# EAGLE board HEX3_main_v2.1 (EAGLE 9.7.0)
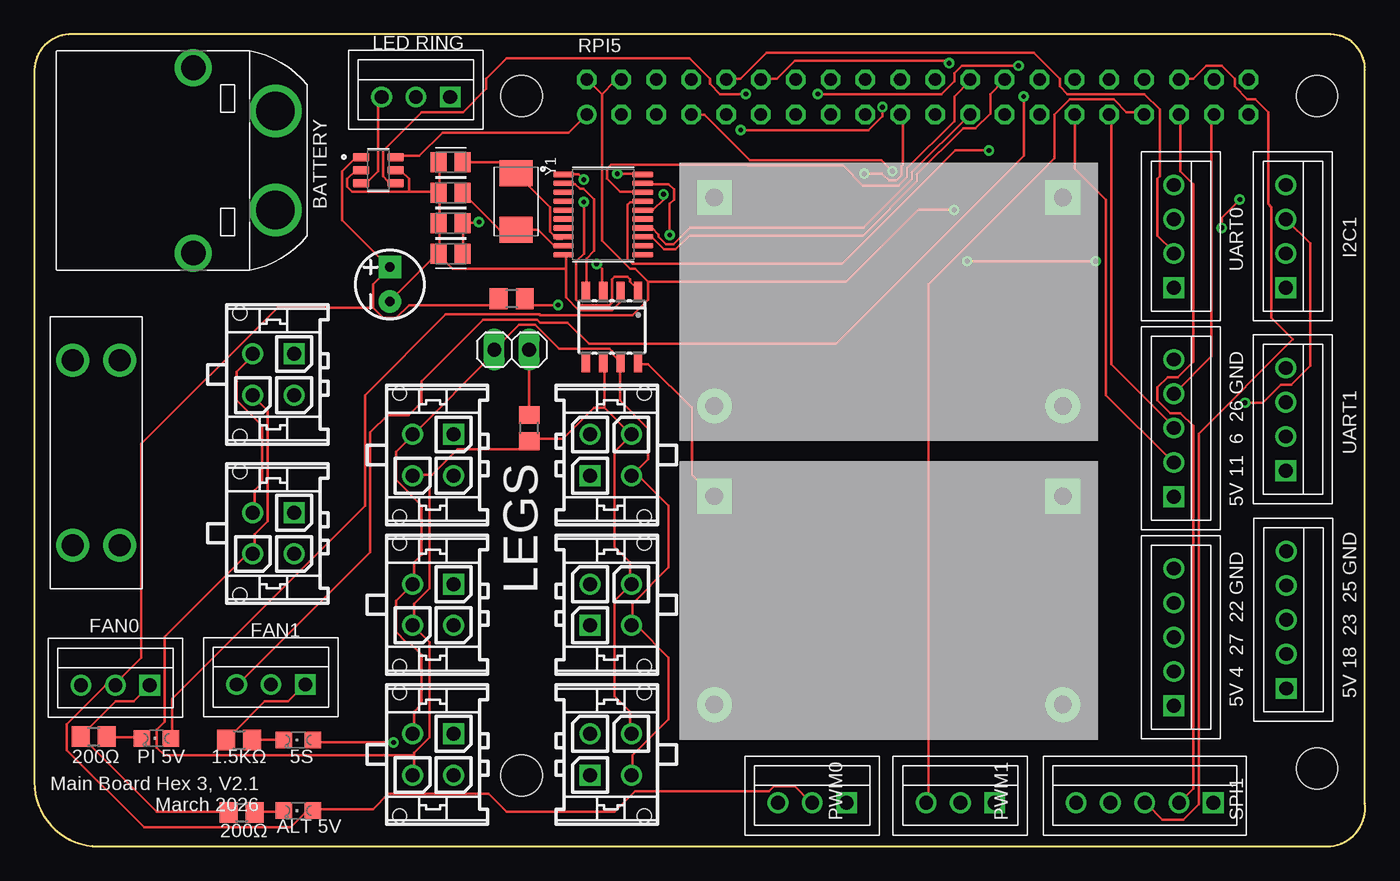
[diagram p0: board, top side]
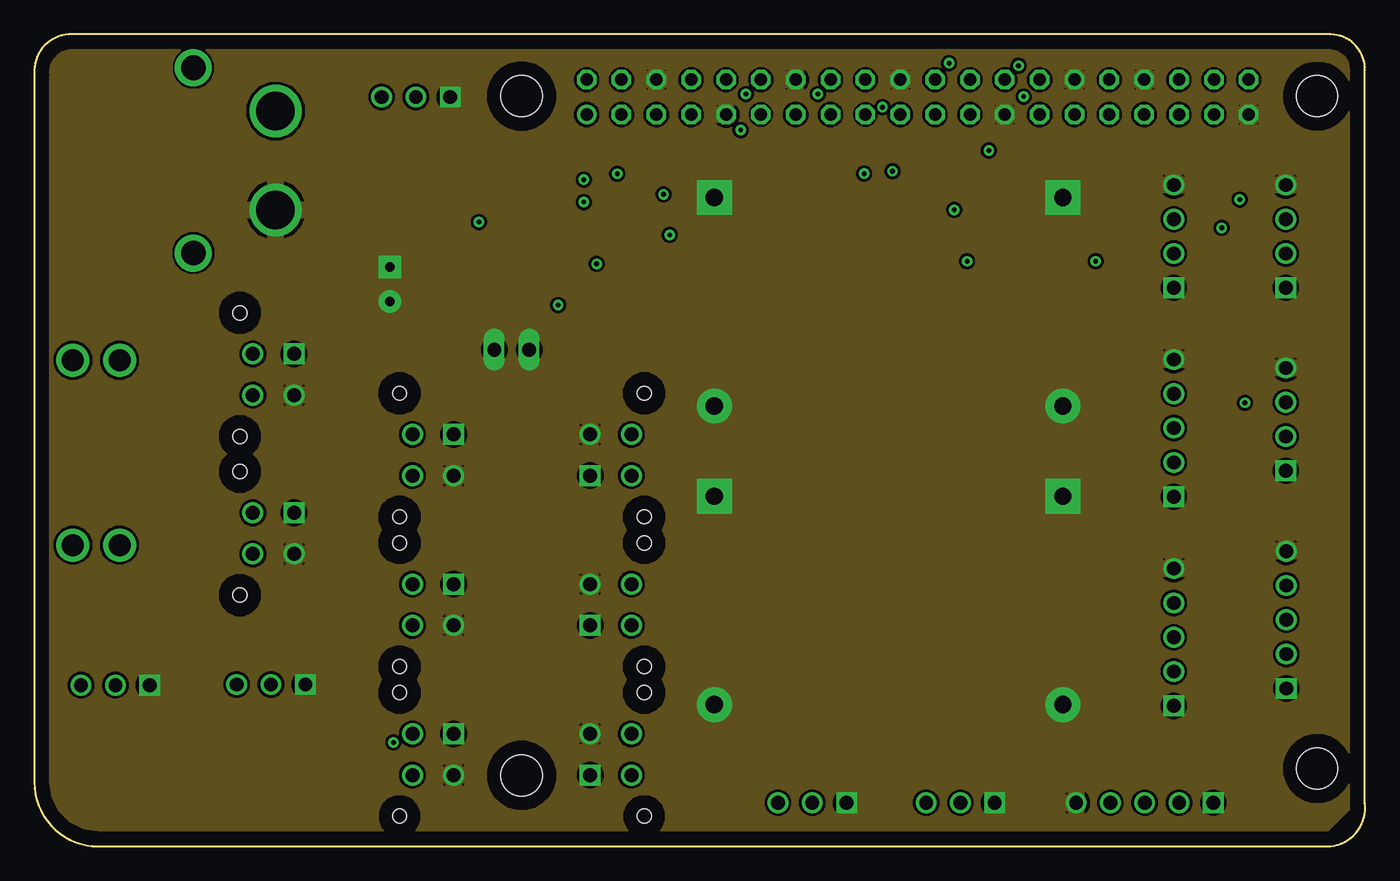
[diagram p1: board, inner layer Route2]
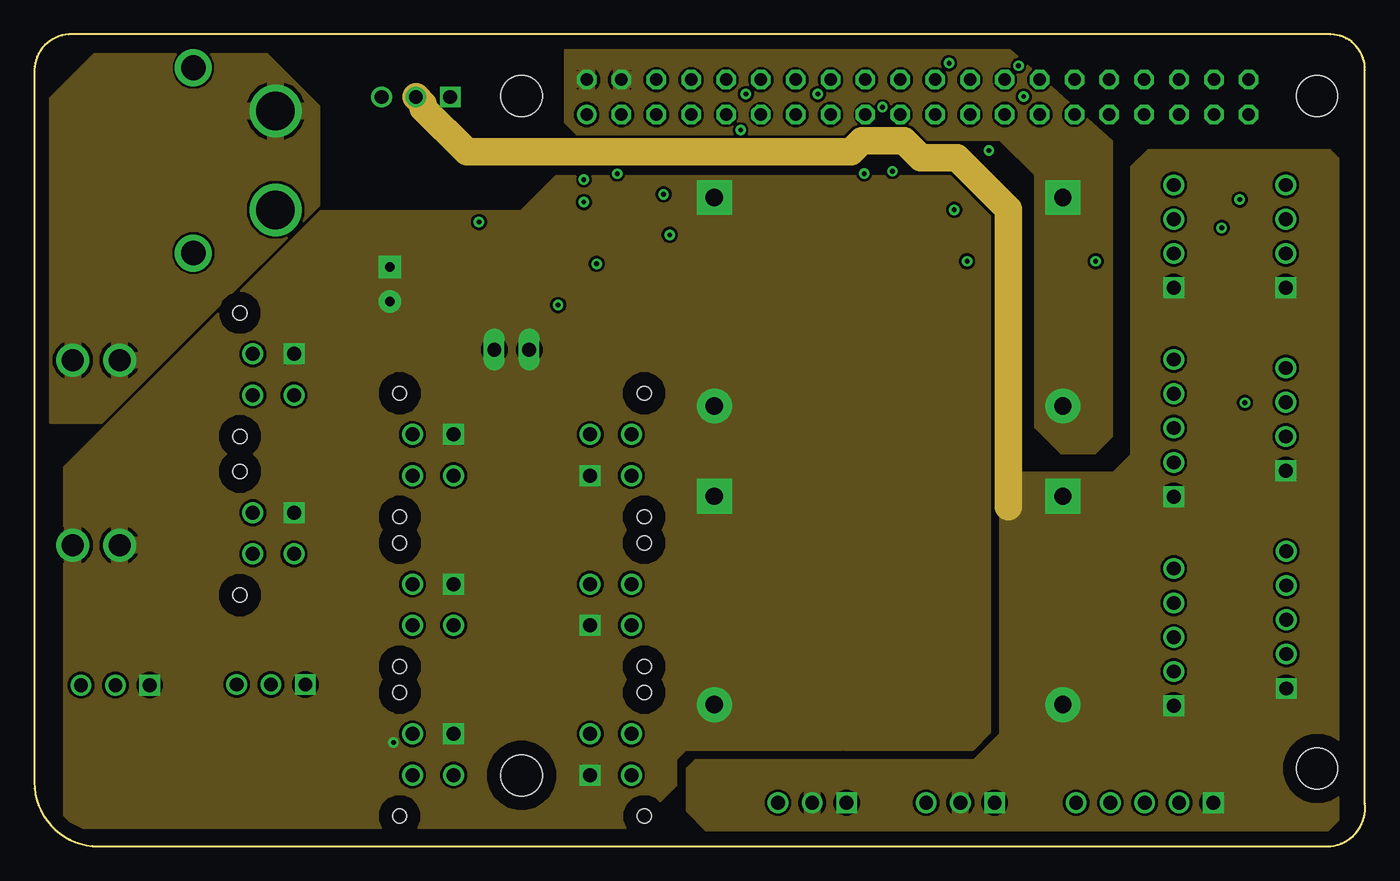
[diagram p2: board, inner layer Route63]
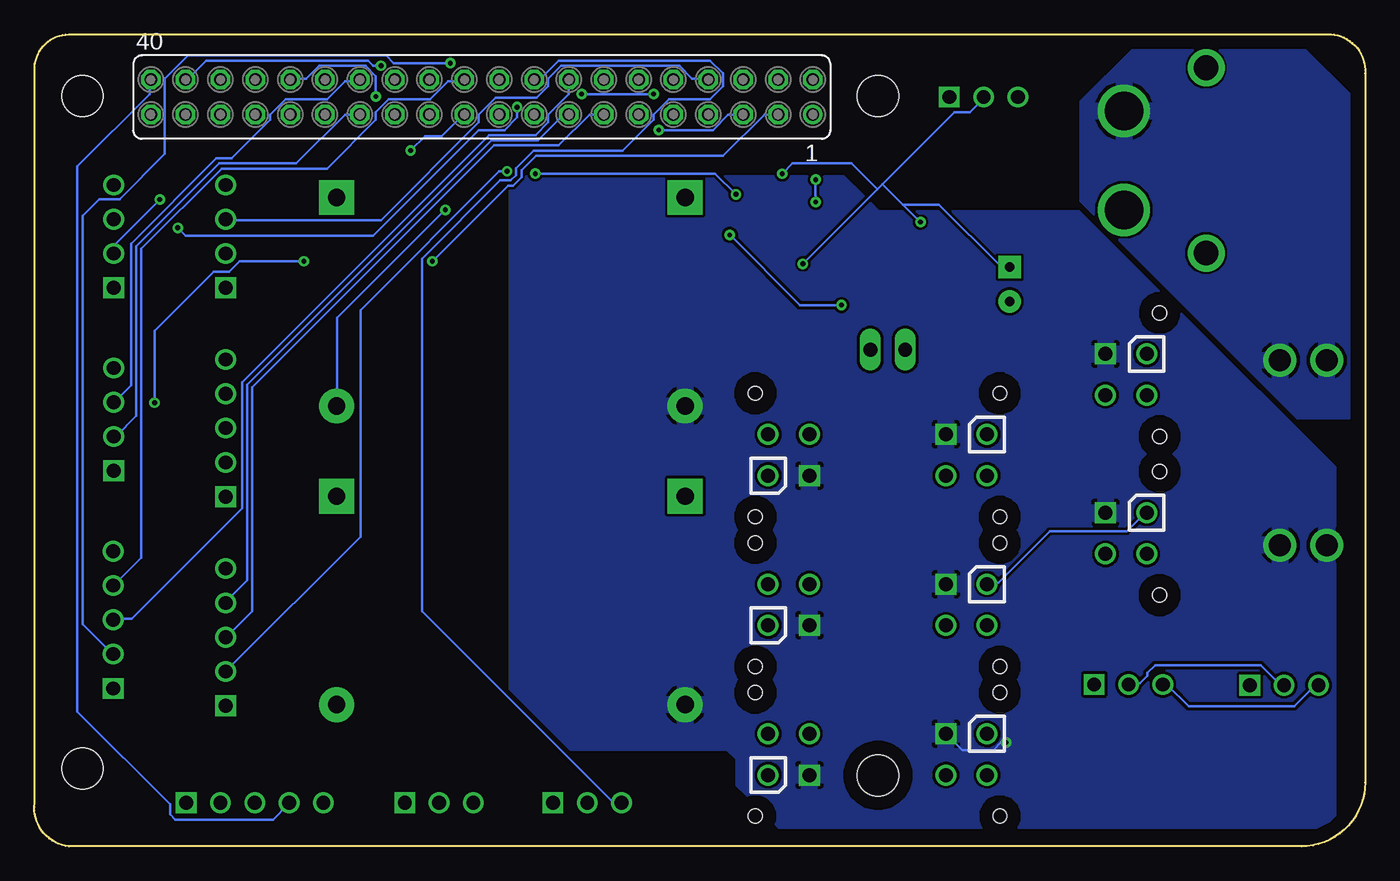
[diagram p3: board, bottom side, seen from below]

Size 97.02 x 59.17 mm. Coordinates in mm from the lower left corner, seen from the top.
Outline: 0,56.34 0,4.65 arc90 4.66,0 94.5,0 arc90 97,3.13 97,56.55 arc90 94.5,59.17 2.5,59.17 arc90 0,56.34
Copper layers (1+2*15+16): Top / Route2 / Route63 / Bottom
Stack-up 4 Layer Stack: Top SilkScreen Epoxy Ink / Top SolderMask SR:Green 0.0254mm Dk 4.3 / Top Surface Finish Lead-Free 0.02mm / Top CuFoil:007 0.035mm / Dielectric-1 Prepreg:001 0.064mm / Dielectric-2 Prepreg:001 0.064mm / Route2 CuFoil:007 0.035mm / Dielectric-3 Core:066 0.711mm / Route63 CuFoil:007 0.035mm / Dielectric-4 Prepreg:001 0.064mm / Dielectric-5 Prepreg:001 0.064mm / Bottom CuFoil:007 0.035mm / Bottom Surface Finish Lead-Free 0.02mm / Bottom SolderMask SR:Green 0.0254mm Dk 4.3 / Bottom SilkScreen Epoxy Ink
Design rules: minimum copper width 0.17mm, minimum drill size 0.35mm, copper clearance classes=0 to classes=0 0.205mm, copper clearance wire_polygon to wire_polygon 6mil, copper clearance wire_polygon to pad_smd 0.17mm, copper clearance wire_polygon to via 0.17mm, copper clearance pad_smd to pad_smd 0.17mm, copper clearance pad_smd to via 0.17mm, copper clearance via to via 0.17mm, copper clearance smd to pad (same net) 0.17mm, copper clearance smd to via (same net) 0.17mm, copper clearance smd to smd (same net) 0.17mm, dimension clearance 40mil, via restrict clearance 0mil, restrict clearance 0mil, drill distance 0.17mm, keepout clearance 0mil
Net classes: 0 default: clearance 0.205 mm
Holes 3 mm at 35.52,5.17 35.52,54.67 93.52,54.67 93.52,5.67

## Footprints (pad centres in the part's own frame; a part is rotated, then mirrored left to right if it is on the bottom)
R0805 = smd 1.3 x 1.5: 1 -0.95,0; 2 0.95,0
CHIPLED_0805 = smd 1.2 x 1.2: A 0,-1.05; C 0,1.05
DF_24VDC_5VDC = drill 1.27 pad 2.54 square: GND1 2.54,17.729; GND2 27.94,17.729 | drill 1.27 pad 2.54: IN+ 2.54,2.54; OUT+ 27.94,2.54
CAPC2012X110 = smd 1.165 x 1.465: 1 -0.875,0; 2 0.875,0
XT60PW-M = drill 2.8: + 3.6,0; - -3.6,0 | drill 1.8: P$3 -6.75,6; P$4 6.75,6
CPOL-RADIAL-2.5MM-5MM = drill 0.7 pad 1.651 square: 1 1.25,0 | drill 0.7 pad 1.651: 2 -1.25,0
FUSE_3557-2 = drill 1.6: 1_1 -6.735,1.7; 1_2 -6.735,-1.7; 2_1 6.735,1.7; 2_2 6.735,-1.7
B3B-XH = drill 1 square: P$1 2.5,0 | drill 1: P$2 0,0; P$3 -2.5,0
1X02 = drill 1.016 long: 1 -1.27,0; 2 1.27,0
FE20-2 = drill 0.914: 1 -24.13,1.27 | drill 0.914 octagon: 2 -24.13,-1.27; 3 -21.59,1.27; 4 -21.59,-1.27; 5 -19.05,1.27; 6 -19.05,-1.27; 7 -16.51,1.27; 8 -16.51,-1.27; 9 -13.97,1.27; 10 -13.97,-1.27; 11 -11.43,1.27; 12 -11.43,-1.27; 13 -8.89,1.27; 14 -8.89,-1.27; 15 -6.35,1.27; 16 -6.35,-1.27; 17 -3.81,1.27; 18 -3.81,-1.27; 19 -1.27,1.27; 20 -1.27,-1.27; 21 1.27,1.27; 22 1.27,-1.27; 23 3.81,1.27; 24 3.81,-1.27; 25 6.35,1.27; 26 6.35,-1.27; 27 8.89,1.27; 28 8.89,-1.27; 29 11.43,1.27; 30 11.43,-1.27; 31 13.97,1.27; 32 13.97,-1.27; 33 16.51,1.27; 34 16.51,-1.27; 35 19.05,1.27; 36 19.05,-1.27; 37 21.59,1.27; 38 21.59,-1.27; 39 24.13,1.27; 40 24.13,-1.27
SOT96-1 = smd 0.6 x 1.3: 1 -1.905,-2.65; 2 -0.635,-2.65; 3 0.635,-2.65; 4 1.905,-2.65; 5 1.905,2.65; 6 0.635,2.65; 7 -0.635,2.65; 8 -1.905,2.65
SOT95P280X145-6N = smd 1.21 x 0.58: 1 -1.255,0.95; 2 -1.255,0; 3 -1.255,-0.95; 4 1.255,-0.95; 5 1.255,0; 6 1.255,0.95
SOP65P640X110-20N = smd 1.5 x 0.41: 1 -2.885,2.925; 2 -2.885,2.275; 3 -2.885,1.625; 4 -2.885,0.975; 5 -2.885,0.325; 6 -2.885,-0.325; 7 -2.885,-0.975; 8 -2.885,-1.625; 9 -2.885,-2.275; 10 -2.885,-2.925; 11 2.885,-2.925; 12 2.885,-2.275; 13 2.885,-1.625; 14 2.885,-0.975; 15 2.885,-0.325; 16 2.885,0.325; 17 2.885,0.975; 18 2.885,1.625; 19 2.885,2.275; 20 2.885,2.925
43045-0412 = drill 1.02 square: P$1 1.5,0 | drill 1.02: P$2 -1.5,0; P$3 1.5,3; P$4 -1.5,3 | hole 1.02: 4.5,3.94; -4.5,3.94
B4B-XH = drill 1 square: P$1 3.75,0 | drill 1: P$2 1.25,0; P$3 -1.25,0; P$4 -3.75,0
B5B-XH = drill 1 square: P$1 5,0 | drill 1: P$2 2.5,0; P$3 0,0; P$4 -2.5,0; P$5 -5,0
XTAL_ABM3-16.000MHZ-D2Y-T = smd 1.9 x 2.4: 1 -2.05,0; 2 2.05,0

## Placement (x,y rotation side)
1.5KΩ  [R0805]  14.93,7.75 0 top
5S  [CHIPLED_0805]  19.24,7.75 90 top
5V_ALT  DF_24VDC_5VDC  [DF_24VDC_5VDC]  47.04,7.79 0 top
5V_OTH  [CHIPLED_0805]  19.24,2.6 90 top
5V_PI  [CHIPLED_0805]  8.89,7.87 90 top
10K  10K  [R0805]  34.8,39.9 180 top
18PF  18pF  [CAPC2012X110]  30.36,47.62 180 top
18PF1  18pF  [CAPC2012X110]  30.36,49.85 180 top
100NF  100nF  [CAPC2012X110]  30.36,45.4 0 top
100NF1  100nF  [CAPC2012X110]  30.36,43.18 0 top
120Ω  120  [R0805]  36.07,30.48 90 top
200Ω  [R0805]  4.32,8 0 top
200Ω1  [R0805]  15.12,2.48 0 top
BATTERY  XT60PW-M  [XT60PW-M]  17.59,49.98 90 top
C1  10uF  [CPOL-RADIAL-2.5MM-5MM]  25.91,40.96 90 top
F1  3557-2  [FUSE_3557-2]  4.51,28.69 270 top
FAN0  03-JST-B3B-XH-A  [B3B-XH]  5.91,11.75 0 top
JP1  PINHD-1X2  [1X02]  34.8,36.2 0 top
LED_RING  03-JST-B3B-XH-A  [B3B-XH]  27.82,54.61 0 top
RPI5  Raspberry Pi  [FE20-2]  64.39,54.6 180 bottom
U1  TJA1050  [SOT96-1]  42.1,37.84 180 top
U2  SN74LVC1T45DBVR  [SOT95P280X145-6N]  25.08,49.28 0 top
U$1  DF_24VDC_5VDC  [DF_24VDC_5VDC]  47.04,29.55 0 top
U$2  03-JST-B3B-XH-A  [B3B-XH]  56.71,3.17 0 top
U$3  03-JST-B3B-XH-A  [B3B-XH]  67.5,3.17 0 top
U$4  MCP2515-I/ST  [SOP65P640X110-20N]  41.47,46.04 0 top
U$5  03-JST-B3B-XH-A  [B3B-XH]  17.26,11.8 0 top
X1  [43045-0412]  40.52,6.7 270 top
X2  [43045-0412]  30.57,17.61 90 top
X3  [43045-0412]  18.93,22.81 90 top
X4  [43045-0412]  40.52,17.61 270 top
X5  [43045-0412]  30.57,28.52 90 top
X6  [43045-0412]  30.57,6.7 90 top
X7  04-JST-B4B-XH-A  [B4B-XH]  83.06,44.45 270 top
X8  04-JST-B4B-XH-A  [B4B-XH]  91.23,31.12 270 top
X9  [43045-0412]  18.93,34.38 90 top
X10  [43045-0412]  40.52,28.52 270 top
X11  04-JST-B4B-XH-A  [B4B-XH]  91.23,44.45 270 top
X12  05-JST-B5B-XH-A  [B5B-XH]  83.06,15.24 270 top
X13  05-JST-B5B-XH-A  [B5B-XH]  80.95,3.17 0 top
X14  05-JST-B5B-XH-A  [B5B-XH]  83.06,30.48 270 top
X15  05-JST-B5B-XH-A  [B5B-XH]  91.26,16.51 270 top
Y1  ABM3-16.000MHZ-D2Y-T  [XTAL_ABM3-16.000MHZ-D2Y-T]  35.12,46.99 270 top

## Library data of the parts
1.5KΩ 10K 120Ω 200Ω 200Ω1 = rcl; SPICEPREFIX: R
5S 5V_OTH 5V_PI = led
5V_ALT U$1 = DFRobot 5V Converter
18PF 18PF1 100NF 100NF1 = Capacitor; CATEGORY: Capacitor; PACKAGE_SIZE: 0805; PACKAGE_TYPE: Surface Mount; SUBCATEGORY: Ceramic Capacitors; TYPE: MLCC
BATTERY = amass
C1 = SparkFun-Capacitors; PROD_ID: CAP-08440
F1 = 3557-2; MANUFACTURER: Keystone; MAXIMUM_PACKAGE_HEIGHT: 7.37mm; PARTREV: D; SNAPEDA_PN: 3557-2; STANDARD: Manufacturer Recommendation
FAN0 LED_RING U$2 U$3 U$5 X7 X8 X11-X15 = bt_con-jst-xh
JP1 = Connector; CATEGORY: Connectors; DESCRIPTION: Header-Straight-2 Position; PACKAGE_TYPE: Through Hole; PITCH: 0.100" (2.54mm); SUBCATEGORY: Headers; TYPE: Male Pins
RPI5 = con-lsta; OC_FARNELL: unknown; OC_NEWARK: unknown
U1 = TJA1050; AVAILABILITY: In Stock; CHECK_PRICES: https://www.snapeda.com/parts/TJA1050/NXP+Semiconductors/view-part/?ref=eda; DESCRIPTION: CAN 1MBd Silent 5V Automotive 8-Pin SO T/R; MF: NXP Semiconductors; MP: TJA1050; PACKAGE: None; PRICE: None; SNAPEDA_LINK: https://www.snapeda.com/parts/TJA1050/NXP+Semiconductors/view-part/?ref=snap
U2 = SN74LVC1T45DBVR
U$4 = MCP2515-I_ST; AVAILABILITY: In Stock; CHECK_PRICES: https://www.snapeda.com/parts/MCP2515-I/ST/Microchip+Technology/view-part/?ref=eda; DESCRIPTION: Microchip CAN Controller 1Mbit/s CAN 2.0B 20-Pin TSSOP | Microchip Technology Inc. MCP2515-I/ST; MF: Microchip Technology; MP: MCP2515-I/ST; PACKAGE: TSSOP-20 Microchip; PRICE: None; SNAPEDA_LINK: https://www.snapeda.com/parts/MCP2515-I/ST/Microchip+Technology/view-part/?ref=snap
X1-X6 X9 X10 = con-molex-micro-fit-3_0
Y1 = ABM3-16.000MHZ-D2Y-T; AVAILABILITY: In Stock; CHECK_PRICES: https://www.snapeda.com/parts/ABM3-16.000MHZ-D2Y-T/Abracon/view-part/?ref=eda; DESCRIPTION: 16 MHz ±20ppm Crystal 18pF 40 Ohms 2-SMD, No Lead; MF: Abracon; MP: ABM3-16.000MHZ-D2Y-T; PACKAGE: SMD-2 Abracon LLC; PRICE: None; SNAPEDA_LINK: https://www.snapeda.com/parts/ABM3-16.000MHZ-D2Y-T/Abracon/view-part/?ref=snap

## Nets
3.3V: RPI5.1 U2.6
5S_BAT: BATTERY.+ F1.1_1 F1.1_2
5S_PROT: 5S.A 5V_ALT.IN+ F1.2_1 F1.2_2 U$1.IN+ X1.P$1 X2.P$1 X3.P$1 X4.P$1 X5.P$1 X6.P$1 X9.P$1 X10.P$1
5V: 5V_PI.A RPI5.2 RPI5.4 U$1.OUT+
5V_ALT: 5V_ALT.OUT+ 5V_OTH.A 10K.2 100NF1.2 100NF.2 C1.1 FAN0.P$2 LED_RING.P$2 U1.3 U2.1 U$2.P$2 U$3.P$2 U$4.20 U$5.P$2 X7.P$1 X8.P$1 X11.P$1 X12.P$1 X13.P$1 X14.P$1 X15.P$1
CANH: JP1.1 U1.7 X1.P$3 X2.P$3 X3.P$3 X4.P$3 X5.P$3 X6.P$3 X9.P$3 X10.P$3
CANH_JUMPER: 120Ω.2 JP1.2
CANL: 120Ω.1 U1.6 X1.P$4 X2.P$4 X3.P$4 X4.P$4 X5.P$4 X6.P$4 X9.P$4 X10.P$4
FAN_PWM: FAN0.P$3 RPI5.32 U$5.P$3
GEN_PWM0: RPI5.18 U$2.P$3
GEN_PWM1: RPI5.33 U$3.P$3
GND: 1.5KΩ.1 5V_ALT.GND1 5V_ALT.GND2 18PF1.2 18PF.2 100NF1.1 100NF.1 200Ω1.1 200Ω.1 BATTERY.- C1.2 FAN0.P$1 LED_RING.P$1 RPI5.6 RPI5.9 RPI5.14 RPI5.20 RPI5.25 RPI5.30 RPI5.34 RPI5.39 U1.2 U1.8 U2.2 U2.5 U$1.GND1 U$1.GND2 U$2.P$1 U$3.P$1 U$4.10 U$5.P$1 X1.P$2 X2.P$2 X3.P$2 X4.P$2 X5.P$2 X6.P$2 X7.P$4 X8.P$4 X9.P$2 X10.P$2 X11.P$4 X12.P$5 X13.P$5 X14.P$5 X15.P$5
GPIO_4: RPI5.7 X12.P$2
GPIO_5: RPI5.29 X14.P$2
GPIO_6: RPI5.31 X14.P$3
GPIO_16: RPI5.36 X13.P$3
GPIO_18: RPI5.12 X15.P$2
GPIO_19: RPI5.35 X13.P$2
GPIO_21: RPI5.40 X13.P$4
GPIO_22: RPI5.15 X12.P$4
GPIO_23: RPI5.16 X15.P$3
GPIO_25: RPI5.22 X15.P$4
GPIO_26: RPI5.37 X14.P$4
GPIO_27: RPI5.13 X12.P$3
I2C1_SCL: RPI5.5 X11.P$2
I2C1_SDA: RPI5.3 X11.P$3
LEDSIG: RPI5.38 U2.4
LEDSIG_CONV: LED_RING.P$3 U2.3
M_CS: RPI5.24 U$4.18
M_INT: RPI5.26 U$4.13
M_OSC1: 18PF.1 U$4.9 Y1.2
M_OSC2: 18PF1.1 U$4.8 Y1.1
M_RXCAN: U1.4 U$4.2
M_SCK: RPI5.23 U$4.14
M_SI: RPI5.19 U$4.16
M_SO: RPI5.21 U$4.17
M_TXCAN: U1.1 U$4.1
N$1: 5V_PI.C 200Ω.2
N$2: 1.5KΩ.2 5S.C
N$3: 5V_OTH.C 200Ω1.2
N$4: 10K.1 U$4.19
RPI_RX0: RPI5.10 X7.P$2
RPI_RX1: RPI5.28 X8.P$3
RPI_TX0: RPI5.8 X7.P$3
RPI_TX1: RPI5.27 X8.P$2

## Tracks (layer width: path | path; a pad name or v marks a point on that pad's centre or on a via)
3.3V
  Top 0.17: U2.6 26.37,50.32 28.06,50.32 29.74,52.01 38.93,52.01 40.24,53.32 RPI5.1
5S_BAT
  pour Route63: 0.51,53.98 4.32,57.78 17.02,57.78 20.83,53.98 20.83,46.67 4.96,30.8 0.51,30.8
  pour Bottom: 0.51,54.29 4.32,58.1 17.02,58.1 20.83,54.29 20.83,46.99 4.96,31.12 0.51,31.12
5S_PROT  (via drill 0.35)
  Top 0.17: v26.18,7.57 20.37,7.57 5S.A
  Bottom 0.17: v26.18,7.57 26.56,7.57 27.12,7.01 29.37,7.01 30.49,8.13 X6.P$1
  pour Route63: 2.1,27.62 20.83,46.35 26.23,46.35 26.23,1.27 2.1,1.27
  pour Route63: 22.1,6.98 21.47,7.62 21.47,42.54 25.28,46.35 35.44,46.35 37.98,48.89 62.74,48.89 63.38,48.26 63.38,11.43 58.93,6.98 47.5,6.98 46.87,6.35 46.87,4.45 43.69,1.27 25.91,1.27 22.1,5.08
  pour Route63: 58.93,48.89 67.19,48.89 69.73,46.35 69.73,8.26 68.46,6.98 58.93,6.98
  pour Bottom: 2.1,27.62 20.83,46.35 26.23,46.35 26.23,1.27 2.1,1.27
  pour Bottom: 21.15,6.98 20.51,7.62 20.51,42.54 24.32,46.35 35.44,46.35 37.98,48.89 61.79,48.89 62.42,48.26 62.42,11.43 57.98,6.98 46.55,6.98 45.91,6.35 45.91,4.45 42.74,1.27 24.96,1.27 21.15,5.08
5V  (via drill 0.35)
  Top 0.17: 44.74,41.13 44.74,39.82 43.62,38.7 36.88,38.7 36.82,38.76 29.99,38.76 24.12,32.88 24.12,24.82 10.06,10.76 10.06,7.95 5V_PI.A | 44.74,41.13 43.81,42.07 43.43,42.07 41.37,44.13 41.37,54.82 | 41.37,54.82 40.43,55.76 RPI5.2 | 41.37,54.82 42.31,55.76 42.68,55.76 RPI5.4 | v67.06,46.38 64.43,46.38 59.18,41.13 44.74,41.13
  Bottom 0.17: v67.06,46.38 74.93,38.51 74.93,32.13 U$1.OUT+
  pour Route63: 38.61,58.42 38.61,52.7 39.88,51.43 70.36,51.43 72.9,48.89 72.9,30.48 74.81,28.58 77.35,28.58 78.62,29.85 78.62,51.43 70.77,58.42
5V_ALT  (via drill 0.35)
  Top 0.17: U2.1 23.74,50.13 23.37,50.13 22.43,49.2 22.43,45.63 25.81,42.26 C1.1 25.81,42.07 24.68,40.95 24.68,39.26 | 24.68,39.26 25.43,38.51 26.37,38.51 27.31,39.45 33.3,39.45 10K.2 | 100NF1.2 31.24,43.2 31.24,45.26 100NF.2 31.24,45.45 32.37,45.45 v32.42,45.49 | v40.99,42.45 41.37,42.07 41.37,40.57 U1.3 | v42.49,49.01 44.18,49.01 U$4.20 | U$2.P$2 56.56,3.26 55.43,4.38 53.93,4.38 53.56,4.01 43.81,4.01 42.31,2.51 34.43,2.51 33.12,3.82 25.81,3.82 24.68,2.7 20.37,2.7 5V_OTH.A 20.18,2.51 19.81,2.51 18.68,1.39 7.99,1.39 2.37,7.01 2.37,8.88 5.18,11.7 5.74,11.7 FAN0.P$2 5.93,11.88 7.81,13.76 7.81,29.32 17.74,39.26 24.68,39.26
  Route63 2: LED_RING.P$2 28.36,54.07 28.36,53.8 31.54,50.61 59.53,50.61 60.33,51.41 63.39,51.41 64.64,50.16 67.25,50.16 71,46.42 71,24.77
  Bottom 0.17: 35.18,48.26 29.93,53.51 28.81,53.51 27.87,54.45 LED_RING.P$2 | 35.18,48.26 35.56,47.88 | 35.56,47.88 v40.99,42.45 | v42.49,49.01 41.74,49.76 37.43,49.76 35.56,47.88 | 35.18,48.26 33.68,46.76 | 33.68,46.76 31.06,46.76 26.56,42.26 25.99,42.26 C1.1 | U$5.P$2 17.18,11.88 16.43,11.88 15.87,12.45 15.87,12.63 15.31,13.2 7.62,13.2 6.31,11.88 5.93,11.88 FAN0.P$2 | 33.68,46.76 v32.42,45.49
  pour Route63: 47.5,2.54 47.5,5.71 48.14,6.35 68.46,6.35 70.36,8.26 70.36,26.04 71.63,27.31 78.62,27.31 79.89,28.58 79.89,49.53 81.16,50.8 94.49,50.8 95.13,50.16 95.13,1.91 93.86,0.64 49.41,0.64
CANH
  Top 0.17: X3.P$3 16.06,24.45 16.06,25.95 16.62,26.51 16.62,30.64 14.74,32.51 14.74,34.57 15.87,35.7 X9.P$3 | X1.P$3 43.62,5.32 43.62,6.63 46.24,9.26 46.24,13.76 43.99,16.01 43.62,16.01 X4.P$3 43.62,16.2 43.62,17.7 46.24,20.32 46.24,24.82 43.81,27.26 | X6.P$3 27.68,8.32 27.68,9.82 28.24,10.38 28.24,13.95 27.31,14.88 27.12,14.88 26.37,15.63 26.37,17.89 27.49,19.01 X2.P$3 27.68,19.2 27.68,20.7 28.24,21.26 28.24,24.82 26.37,26.7 26.37,28.76 27.49,29.89 X5.P$3 27.68,30.07 33.53,35.92 JP1.1 35.35,38.01 36.51,38.01 38.26,36.26 39.87,36.26 39.88,36.26 41.93,36.26 42.12,36.07 42.12,35.88 42.68,35.32 U1.7 42.68,35.13 42.68,32.51 44.74,30.45 44.74,28.2 43.81,27.26 | 43.81,27.26 43.62,27.07 X10.P$3 43.81,27.26
  Bottom 0.17: X3.P$3 16.06,24.26 17.37,22.95 22.99,22.95 26.74,19.2 27.49,19.2 X2.P$3
CANH_JUMPER
  Top 0.17: 120Ω.2 JP1.2
CANL
  Top 0.17: X9.P$4 16.06,32.7 16.99,31.76 16.99,23.7 16.06,22.76 16.06,21.45 X3.P$4 15.87,21.26 15.49,21.26 9.49,15.26 9.49,9.07 8.93,8.51 8.93,7.2 9.49,6.63 27.68,6.63 | X1.P$4 43.43,8.32 43.43,9.82 42.31,10.95 42.31,17.89 43.43,19.01 X4.P$4 43.43,19.2 43.43,20.7 42.31,21.82 42.31,28.76 43.43,29.89 X10.P$4 43.43,30.07 41.56,31.95 | 27.68,6.63 27.68,6.82 28.81,7.95 28.81,14.88 27.68,16.01 X2.P$4 27.68,16.2 27.68,17.7 28.81,18.82 28.81,27.07 | 27.68,6.63 27.68,5.32 X6.P$4 | 41.56,31.95 41.56,35.13 U1.6 | 41.56,31.95 40.81,31.95 38.56,29.7 36.12,29.7 120Ω.1 35.93,29.51 35.37,28.95 30.87,28.95 28.99,27.07 28.81,27.07 | 28.81,27.07 27.68,27.07 X5.P$4
FAN_PWM  (via drill 0.35)
  Top 0.17: v72.12,54.63 72.12,50.32 58.43,36.63 40.42,36.63 38.88,38.17 36.88,38.17 36.66,38.38 32.72,38.38 28.24,33.9 28.24,32.35 27.29,31.4 25.74,31.4 24.49,30.16 24.49,21.45 14.93,11.88 U$5.P$3
  Bottom 0.17: v72.12,54.63 72.12,56.13 72.87,56.88 76.24,56.88 77.18,55.95 78.31,55.95 RPI5.32 | FAN0.P$3 3.49,11.7 3.87,11.32 4.06,11.32 5.18,10.2 12.87,10.2 14.37,11.7 14.74,11.7 U$5.P$3
GEN_PWM0
  Bottom 0.17: RPI5.18 60.49,55.95 60.12,55.95 58.81,57.26 47.74,57.26 46.81,56.32 46.81,55.38 47.74,54.45 50.74,54.45 51.87,53.32 51.87,52.95 54.12,50.7 60.61,50.7 61.89,49.42 61.89,48.92 62.28,48.53 63.05,48.53 68.74,42.83 68.74,17.14 54.87,3.26 54.31,3.26 U$2.P$3
GEN_PWM1
  Top 0.17: RPI5.33 80.74,53.51 79.62,53.51 78.68,54.45 75.49,54.45 74.37,53.32 74.37,50.13 65.18,40.95 65.18,3.26 U$3.P$3
GND
  Top 0.17: U1.8 44.18,35.13 44.74,35.13 47.93,31.95 47.93,27.07 49.49,25.51 5V_ALT.GND1 | 38.74,42.07 38.74,43.01 U$4.10 | 38.74,42.07 38.74,40.01 39.68,39.07 42.12,39.07 42.68,39.63 42.68,40.38 U1.2 | 100NF1.1 29.56,43.2 29.56,45.26 100NF.1 29.56,45.45 29.56,47.51 18PF.2 | 27.31,47.7 29.37,47.7 18PF.2 | 27.31,47.7 23.18,47.7 22.81,48.07 22.81,48.63 23.37,49.2 23.74,49.2 U2.2 | 27.31,47.7 27.31,48.63 26.74,49.2 26.37,49.2 U2.5 | 18PF1.2 29.56,49.76 29.56,47.7 18PF.2 | C1.2 25.99,39.82 29.37,43.2 100NF1.1 | 38.74,42.07 30.49,42.07 29.56,43.01 100NF1.1 | FAN0.P$1 8.37,11.7 7.24,10.57 5.93,10.57 3.49,8.13 200Ω.1 3.49,7.95 8.93,2.51 13.99,2.51 200Ω1.1 | 14.37,8.13 16.81,10.57 18.49,10.57 19.62,11.7 U$5.P$1 | 14.37,8.13 13.99,7.76 1.5KΩ.1 14.37,8.13
  pour Route2: 0.51,56.52 3.05,59.05 95.13,59.05 96.4,57.78 96.4,3.17 93.86,0.64 3.37,0.64 0.51,3.49
GPIO_4  (via drill 0.35)
  Top 0.17: RPI5.7 47.93,53.32 48.87,53.32 52.19,50 61.75,50 v62.56,49.2
  Bottom 0.17: X12.P$2 82.99,12.82 73.24,22.57 73.24,39.07 63.12,49.2 v62.56,49.2
GPIO_5
  Top 0.17: RPI5.29 75.87,53.32 75.87,49.38 78.12,47.13 78.12,32.88 82.99,28.01 X14.P$2
GPIO_6
  Top 0.17: RPI5.31 78.49,53.32 78.49,35.13 82.99,30.64 X14.P$3
GPIO_16
  Top 0.17: RPI5.36 83.56,55.95 84.49,55.95 85.43,56.88 86.56,56.88 87.49,55.95 87.49,55.38 88.43,54.45 88.99,54.45 89.96,53.49 89.96,46.81 90.18,46.59 90.18,38.51 91.74,36.95 84.87,30.07 84.87,3.07 83.74,1.95 82.24,1.95 81.12,3.07 X13.P$3
GPIO_18  (via drill 0.35)
  Top 0.17: v66.68,57.07 66.49,57.26 55.43,57.26 54.12,55.95 52.99,55.95 RPI5.12
  Bottom 0.17: v66.68,57.07 70.81,57.07 71.37,57.63 85.81,57.63 87.49,55.95 87.49,50.45 90.79,47.16 92.29,47.16 93.49,45.95 93.49,16.2 91.43,14.13 X15.P$2
GPIO_19
  Top 0.17: RPI5.35 83.56,53.32 83.56,49.2 84.49,48.26 84.49,35.32 83.37,34.2 82.62,34.2 81.87,33.45 81.87,32.51 82.81,31.57 83.56,31.57 84.49,30.64 84.49,4.2 83.56,3.26 X13.P$2
GPIO_21
  Bottom 0.17: RPI5.40 88.62,55.76 88.62,54.82 93.87,49.57 93.87,9.82 87.12,3.07 87.12,2.32 86.74,1.95 79.62,1.95 78.49,3.07 X13.P$4
GPIO_22
  Bottom 0.17: RPI5.15 58.06,53.32 58.43,53.32 60.31,51.45 63.68,51.45 81.49,33.63 81.49,19.39 82.99,17.89 X12.P$4
GPIO_23
  Bottom 0.17: RPI5.16 58.06,55.76 58.06,54.82 59.56,53.32 59.56,52.76 60.49,51.82 63.87,51.82 81.87,33.82 81.87,24.64 89.93,16.57 91.24,16.57 X15.P$3
GPIO_25
  Bottom 0.17: RPI5.22 65.74,55.76 66.87,55.76 68.18,54.45 71.18,54.45 72.12,53.51 72.12,52.95 75.68,49.38 83.37,49.38 89.21,43.55 89.21,21.05 91.24,19.01 X15.P$4
GPIO_26
  Top 0.17: RPI5.37 85.81,53.32 85.81,35.7 83.18,33.07 X14.P$4
GPIO_27
  Bottom 0.17: RPI5.13 55.62,53.32 56.56,53.32 58.81,51.07 63.49,51.07 81.12,33.45 81.12,17.14 82.99,15.26 X12.P$3
I2C1_SCL  (via drill 0.35)
  Top 0.17: v86.56,45.07 86.56,45.82 v87.87,47.13 | v61.83,53.86 61.83,53.21 60.82,52.2 v51.49,52.2
  Bottom 0.17: v51.49,52.2 47.56,52.2 46.43,53.32 45.49,53.32 RPI5.5 | v86.56,45.07 85.99,44.51 72.31,44.51 64.62,52.2 62.74,52.2 61.83,53.11 v61.83,53.86 | v87.87,47.13 v87.88,47.13 91.32,43.7 X11.P$2
I2C1_SDA  (via drill 0.35)
  Top 0.17: v77.37,42.63 v67.99,42.63 | v88.24,32.32 89.56,32.32 90.87,33.63 91.62,33.63 93,35.01 93,43.95 91.32,45.63 X11.P$3
  Bottom 0.17: v77.37,42.63 82.06,42.63 82.81,41.88 83.93,41.88 88.24,37.57 v88.24,32.32 | RPI5.3 42.87,53.32 43.81,53.32 46.81,50.32 60.45,50.32 61.51,49.26 61.51,48.76 62.13,48.15 62.48,48.15 v67.99,42.63
LEDSIG  (via drill 0.35)
  Top 0.17: v51.87,54.82 49.99,54.82 49.24,55.57 49.24,55.95 47.74,57.45 34.43,57.45 32.93,55.95 32.93,55.2 31.24,53.51 28.24,53.51 25.43,50.7 25.43,48.82 25.81,48.45 26.18,48.45 U2.4 | v57.12,54.82 66.12,54.82 67.06,55.76 67.06,56.32 67.62,56.88 v71.74,56.88
  Bottom 0.17: v57.12,54.82 v51.87,54.82 | v71.74,56.88 72.31,56.88 72.68,57.26 84.49,57.26 85.81,55.95 RPI5.38
LEDSIG_CONV
  Top 0.17: U2.3 23.93,48.45 24.31,48.45 25.06,49.2 25.06,54.26 25.24,54.45 LED_RING.P$3
M_CS
  Top 0.17: U$4.18 44.18,47.7 42.68,47.7 41.74,48.63 41.74,49.38 42.04,49.68 51.98,49.68 52.03,49.63 58.94,49.63 60.42,48.15 62.99,48.15 63.6,48.76 63.6,49.4 67.06,52.85 67.06,54.63 68.18,55.76 RPI5.24
M_INT
  Top 0.17: RPI5.26 70.62,55.76 69.68,54.82 69.68,53.39 68.62,52.33 67.72,52.33 64.35,48.96 64.35,48.45 60.41,44.51 47.75,44.51 46.75,43.51 45.89,43.51 44.99,44.41 U$4.13
M_OSC1
  Top 0.17: 18PF.1 33.92,44.94 Y1.2 36.72,44.94 37.9,43.76 U$4.9
M_OSC2
  Top 0.17: 18PF1.1 34.31,49.85 Y1.1 37.58,46.58 37.58,44.78 38.08,44.28 38.46,44.28 U$4.8
M_RXCAN
  Top 0.17: U1.4 40.24,40.57 40.24,42.82 40.81,43.38 40.81,47.14 40.04,47.91 39.78,47.91 39.43,48.26 38.64,48.26 U$4.2
M_SCK
  Top 0.17: RPI5.23 68.19,53.33 63.98,49.12 63.98,48.61 60.44,45.07 47.78,45.07 46.6,43.89 46.04,43.89 45.52,44.41 45.52,44.58 45.04,45.06 U$4.14
M_SI  (via drill 0.35)
  Top 0.17: v45.87,47.51 45.87,47.13 45.12,46.38 44.37,46.38 U$4.16 | RPI5.19 63.31,53.32 63.31,49.63 63.23,49.55 63.23,48.92 62.83,48.53 62.28,48.53 61.79,49.02 v60.49,49.02
  Bottom 0.17: v60.49,49.02 47.38,49.02 v45.87,47.51
M_SO  (via drill 0.35)
  Top 0.17: U$4.17 44.18,46.95 43.43,46.95 43.24,46.76 43.24,42.82 43.62,42.45 58.88,42.45 67.14,50.71 v69.58,50.71
  Bottom 0.17: RPI5.21 65.74,53.32 67.32,51.75 68.54,51.75 v69.58,50.71
M_TXCAN  (via drill 0.35)
  Top 0.17: v40.06,46.95 40.06,43.2 39.49,42.63 39.49,39.82 39.87,39.45 41.93,39.45 42.12,39.63 42.12,41.32 42.31,41.51 43.24,41.51 43.43,41.32 43.43,41.13 43.99,40.57 U1.1 | U$4.1 39.68,48.96 v40.06,48.58
  Bottom 0.17: v40.06,48.58 v40.06,46.95
N$1
  Top 0.17: 5V_PI.C 7.81,7.95 5.37,7.95 200Ω.2
N$2
  Top 0.17: 5S.C 18.12,7.76 16.06,7.76 1.5KΩ.2
N$3
  Top 0.17: 5V_OTH.C 18.12,2.51 16.24,2.51 200Ω1.2
N$4  (via drill 0.35)
  Top 0.17: v38.18,39.45 36.34,39.45 10K.1 | U$4.19 44.37,48.26 46.24,48.26 46.62,47.88 46.62,47.13 46.32,46.84 v46.32,44.56
  Bottom 0.17: v38.18,39.45 41.21,39.45 v46.32,44.56
RPI_RX0
  Top 0.17: RPI5.10 50.56,55.95 51.49,55.95 53.37,57.82 72.87,57.82 74.74,55.95 74.74,55.38 75.31,54.82 80.93,54.82 82.06,53.7 82.06,48.82 81.87,48.63 81.87,44.51 82.99,43.38 X7.P$2
RPI_RX1
  Bottom 0.17: RPI5.28 73.43,55.76 74.37,55.76 75.68,54.45 78.68,54.45 79.81,53.32 79.81,52.95 82.62,50.13 83.74,50.13 89.96,43.92 89.96,33.61 91.06,32.51 X8.P$3
RPI_TX0
  Bottom 0.17: RPI5.8 47.93,55.95 49.06,55.95 49.99,56.88 58.62,56.88 59.56,55.95 59.56,55.38 60.41,54.53 63.41,54.53 64.62,53.32 64.62,52.76 71.74,45.63 82.99,45.63 X7.P$3
RPI_TX1
  Bottom 0.17: RPI5.27 73.43,53.32 74.37,53.32 77.93,49.76 83.56,49.76 89.58,43.74 89.58,31.36 91.06,29.89 X8.P$2

## Text on the board
SilkscreenTop: LED RING | I2C1 | UART0 | UART1 | 5V 11 6 26 GND | LEGS | FAN0 | FAN1 | 5V 4 27 22 GND | 5V 18 23 25 GND | 200Ω | PI 5V | 1.5KΩ | 5S | Main Board Hex 3, V2.1 / March 2026 | PWM0 | PWM1 | SPI1 | 200Ω | ALT 5V